# EAGLE board CT_schematic (EAGLE 7.6.0)

Size 100 x 80 mm. Coordinates in mm from the lower left corner, seen from the top.
Outline: 0,0 100,0 100,80 0,80 0,0
Copper layers (1*16): Top 0.035mm / dielectric 1.5mm / Bottom 0.035mm
Design rules "default": minimum track width 10mil, minimum drill 24mil, track to track 8mil, track to pad 8mil, pad to pad 8mil, via to via 8mil, smd to smd 8mil, copper to edge 40mil, drill to drill 8mil, minimum pad ring 10mil, minimum via ring 8mil, stop-mask expansion 4mil, vias tented up to drill 0mil, thermal gap 10mil

## Footprints (pad centres in the part's own frame; a part is rotated, then mirrored left to right if it is on the bottom)
C0603 = smd 0.8 x 0.8: 1 -0.762,0; 2 0.762,0
C0402 = smd 0.5 x 0.5: 1 -0.508,0; 2 0.508,0
C0805 = smd 1.2 x 1.3: 1 -1.016,0; 2 1.016,0
C1210 = smd 1.2 x 2.5: 1 -1.524,0; 2 1.524,0
EXV-9H = smd 3.505 x 1.676: 1 -2.857,0; 2 2.857,0
PJ-037B_PACKAGE = drill 3.7 square: 1 12,0 | drill 3.2 square: 2 6,0
R0603 = smd 0.8 x 0.8: 1 -0.762,0; 2 0.762,0
WLCSP64 = smd 0.34 x 0.34: A1 -1.75,1.75; A2 -1.25,1.75; A3 -0.75,1.75; A4 -0.25,1.75; A5 0.25,1.75; A6 0.75,1.75; A7 1.25,1.75; A8 1.75,1.75; B1 -1.75,1.25; B2 -1.25,1.25; B3 -0.75,1.25; B4 -0.25,1.25; B5 0.25,1.25; B6 0.75,1.25; B7 1.25,1.25; B8 1.75,1.25; C1 -1.75,0.75; C2 -1.25,0.75; C3 -0.75,0.75; C4 -0.25,0.75; C5 0.25,0.75; C6 0.75,0.75; C7 1.25,0.75; C8 1.75,0.75; D1 -1.75,0.25; D2 -1.25,0.25; D3 -0.75,0.25; D4 -0.25,0.25; D5 0.25,0.25; D6 0.75,0.25; D7 1.25,0.25; D8 1.75,0.25; E1 -1.75,-0.25; E2 -1.25,-0.25; E3 -0.75,-0.25; E4 -0.25,-0.25; E5 0.25,-0.25; E6 0.75,-0.25; E7 1.25,-0.25; E8 1.75,-0.25; F1 -1.75,-0.75; F2 -1.25,-0.75; F3 -0.75,-0.75; F4 -0.25,-0.75; F5 0.25,-0.75; F6 0.75,-0.75; F7 1.25,-0.75; F8 1.75,-0.75; G1 -1.75,-1.25; G2 -1.25,-1.25; G3 -0.75,-1.25; G4 -0.25,-1.25; G5 0.25,-1.25; G6 0.75,-1.25; G7 1.25,-1.25; G8 1.75,-1.25; H1 -1.75,-1.75; H2 -1.25,-1.75; H3 -0.75,-1.75; H4 -0.25,-1.75; H5 0.25,-1.75; H6 0.75,-1.75; H7 1.25,-1.75; H8 1.75,-1.75
SOIC-8 = smd 1.6 x 0.6: 1 -2.7,1.905 | smd 1.55 x 0.6: 2 -2.7,0.635; 3 -2.7,-0.635; 4 -2.7,-1.905; 5 2.7,-1.905; 6 2.7,-0.635; 7 2.7,0.635; 8 2.7,1.905
10100565 = smd 0.8 x 2.35: 1 0,0; 2 1.25,0; 3 2.55,0; 4 4.25,0; 5 5.43,0; 6 6.68,0; 7 7.93,0; 8 9.18,0; 9 11.67,0; 10 14.18,0; 11 15.43,0; 12 16.68,0; 13 17.93,0; 14 19.18,0; 15 21.68,0 | smd 1.5 x 3.1: 16 23.495,-1.375; 20 25.685,-22.875 | smd 1.55 x 3.1: 17 -1.815,-1.375; 21 -1.815,-22.875 | drill 1.1 pad 1.1: 18 21.68,-2.375; 19 0.68,-2.375
TDFN-8/6MM = smd 0.3 x 0.75: 1 0,0; 2 0.5,0; 3 1,0; 4 1.5,0; 5 1.5,3; 6 1,3; 7 0.5,3; 8 0,3
ABLS-25.000MHZ-B2F-T = smd 5.6 x 2.8: 1 -3.81,0; 2 5.69,0
ASEK = smd 1.4 x 1: 1 -1.1,-0.8; 2 1.1,-0.8; 3 1.1,0.8; 4 -1.1,0.8
WSON-8 = smd 0.3 x 0.6: 1 -0.75,0; 2 0.05,0; 3 0.85,0; 4 1.65,0; 5 1.65,3.8; 6 0.85,3.8; 7 0.05,3.8; 8 -0.75,3.8 | smd 3 x 2.6: PAD 0.45,1.9
SON-6 = smd 0.55 x 0.3: 1 -0.355,0.5 | smd 0.52 x 0.3: 2 -0.37,0; 3 -0.37,-0.5; 4 0.37,-0.5; 5 0.37,0; 6 0.37,0.5
SW_4-1437565-2 = smd 1.4 x 2.1: 1 -2.23,4.55; 2 -2.23,-4.55; 3 2.23,4.55; 4 2.23,-4.55
LGM67K-G1J2-24-Z = smd 0.8 x 1.4: A -2,0; C 0,0
NC7SZ125M5X = smd 1.3 x 0.7: 1 -1.3,0.95; 2 -1.3,0; 3 -1.3,-0.95; 4 1.3,-0.95; 5 1.3,0.95

## Placement (x,y rotation side)
C1  1e-07  [C0603]  -27.94,72.39 0 top  (outside the outline)
C2  1e-07  [C0603]  -31.75,72.39 0 top  (outside the outline)
C3  1e-07  [C0603]  -35.56,72.39 0 top  (outside the outline)
C4  1e-07  [C0603]  -39.37,72.39 0 top  (outside the outline)
C5  4.7e-06  [C0603]  -24.13,72.39 0 top  (outside the outline)
C6  1e-07  [C0603]  -43.18,72.39 0 top  (outside the outline)
C7  1e-08  [C0603]  -46.99,72.39 0 top  (outside the outline)
C8  1e-06  [C0603]  -50.8,72.39 0 top  (outside the outline)
C9  1e-11  [C0402]  -22.86,77.47 0 top  (outside the outline)
C10  1e-11  [C0402]  -26.67,77.47 0 top  (outside the outline)
C11  1e-08  [C0402]  -30.48,77.47 0 top  (outside the outline)
C12  1e-07  [C0402]  -34.29,77.47 0 top  (outside the outline)
C13  1e-05  [C0805]  -34.29,60.96 0 top  (outside the outline)
C14  1e-08  [C0402]  -38.1,77.47 0 top  (outside the outline)
C15  1e-08  [C0402]  -41.91,77.47 0 top  (outside the outline)
C16  1e-08  [C0402]  -45.72,77.47 0 top  (outside the outline)
C17  1e-05  [C1210]  -16.51,62.23 0 top  (outside the outline)
C18  1e-05  [C1210]  -22.86,62.23 0 top  (outside the outline)
C19  1e-07  [C0402]  -49.53,77.47 0 top  (outside the outline)
C20  0.0001  [EXV-9H]  -17.78,54.61 0 top  (outside the outline)
C21  0.0001  [EXV-9H]  -29.21,54.61 0 top  (outside the outline)
C22  1e-08  [C0402]  -53.34,77.47 0 top  (outside the outline)
J1  PJ-037B  [PJ-037B_PACKAGE]  -58.42,7.62 0 top  (outside the outline)
R2  1000.0  [R0603]  -54.61,72.39 0 top  (outside the outline)
R4  4700.0  [R0603]  -58.42,72.39 0 top  (outside the outline)
R5  2200.0  [R0603]  -62.23,72.39 0 top  (outside the outline)
R6  2200.0  [R0603]  -66.04,72.39 0 top  (outside the outline)
R7  10000.0  [R0603]  -50.8,67.31 0 top  (outside the outline)
R8  10000.0  [R0603]  -55.88,67.31 0 top  (outside the outline)
R9  10000.0  [R0603]  -60.96,67.31 0 top  (outside the outline)
R10  10000.0  [R0603]  -66.04,67.31 0 top  (outside the outline)
R11  100000.0  [R0603]  -39.37,60.96 0 top  (outside the outline)
R12  100000.0  [R0603]  -44.45,60.96 0 top  (outside the outline)
R13  100000.0  [R0603]  -49.53,60.96 0 top  (outside the outline)
R14  100000.0  [R0603]  -54.61,60.96 0 top  (outside the outline)
R15  100000.0  [R0603]  -59.69,60.96 0 top  (outside the outline)
R16  100000.0  [R0603]  -64.77,60.96 0 top  (outside the outline)
R17  100000.0  [R0603]  -69.85,60.96 0 top  (outside the outline)
R18  100000.0  [R0603]  -15.24,67.31 0 top  (outside the outline)
R19  100000.0  [R0603]  -20.32,67.31 0 top  (outside the outline)
R20  100000.0  [R0603]  -25.4,67.31 0 top  (outside the outline)
R21  100000.0  [R0603]  -30.48,67.31 0 top  (outside the outline)
R22  100000.0  [R0603]  -35.56,67.31 0 top  (outside the outline)
R23  2231.0  [R0603]  -69.85,72.39 0 top  (outside the outline)
R24  1000.0  [R0603]  -15.24,77.47 0 top  (outside the outline)
R25  10000.0  [R0603]  -15.24,72.39 0 top  (outside the outline)
R26  10000.0  [R0603]  -20.32,72.39 0 top  (outside the outline)
R27  9100.0  [R0603]  -19.05,77.47 0 top  (outside the outline)
R28  680000.0  [R0603]  -40.64,67.31 0 top  (outside the outline)
R29  120000.0  [R0603]  -45.72,67.31 0 top  (outside the outline)
U1  STM32L162RDY6  [WLCSP64]  -44.45,45.72 0 top  (outside the outline)
U2  AT25010B-SSHL-T  [SOIC-8]  -57.15,34.29 0 top  (outside the outline)
U3  10100565  [10100565]  -40.64,25.4 0 top  (outside the outline)
U4  24AA04-I/MC  [TDFN-8/6MM]  -41.91,34.29 0 top  (outside the outline)
U5  ABLS-25.000MHZ-B2F-T  [ABLS-25.000MHZ-B2F-T]  -48.26,54.61 0 top  (outside the outline)
U6  ASEK-32.768KHz-ECST  [ASEK]  -64.77,45.72 0 top  (outside the outline)
U7  LP3878SDX-ADJ/NOPB  [WSON-8]  -30.48,44.45 0 top  (outside the outline)
U8  TPS3895ADRYR  [SON-6]  -55.88,76.2 0 top  (outside the outline)
U9  4-1437565-2  [SW_4-1437565-2]  -27.94,35.56 0 top  (outside the outline)
U10  Q65110A2395  [LGM67K-G1J2-24-Z]  -59.69,54.61 0 top  (outside the outline)
U11  nc7sz125m5x  [NC7SZ125M5X]  -27.94,60.96 0 top  (outside the outline)

## Library data of the parts
C1-C22 J1 R2 R4-R29 U1-U11 = circuit_tree

## Nets
CLK_CRYSTAL_U1_D7: C9.1 U1.D7 U5.1
CLK_CRYSTAL_U1_D8: C10.1 U1.D8 U5.2
CLK_U1_B8: U1.B8 U6.3
GND: C1.2 C2.2 C3.2 C4.2 C5.2 C6.2 C7.2 C8.2 C9.2 C10.2 C11.2 C12.2 C13.2 C14.2 C15.2 C16.2 C17.2 C18.2 C19.2 C20.2 C21.2 C22.2 J1.2 R2.2 R7.2 R24.2 R27.2 R29.2 U1.A7 U1.B1 U1.E7 U1.F5 U1.H2 U2.4 U3.6 U3.10 U3.12 U3.16 U3.17 U3.20 U3.21 U4.4 U4.7 U6.2 U7.3 U7.PAD U8.2 U10.C U11.1 U11.3
NET_U1_A6: R7.1 U1.A6
NET_U1_B5: R5.1 U1.B5 U4.6
NET_U1_C5: R6.1 U1.C5 U4.5
NET_U1_C6: C6.1 U1.C6
NET_U1_C7: R4.1 U1.C7 U11.4
NET_U1_H7: U10.A
NET_U1_H8: U9.3 U9.4
NET_U2_3: R8.1 U2.3
NET_U2_7: R10.1 U2.7
NET_U3_1: R13.1 U3.1
NET_U3_2: R12.1 U3.2
NET_U3_18: U3.18 U3.19
NET_U7_1: C16.1 U7.1
NET_U7_6: R23.2 R24.1 U7.6
NET_U7_8: R22.1 U7.8
NET_U8_1: R26.1 R27.1 U8.1
NET_U8_3: R28.2 R29.1 U8.3
NET_U8_4: R25.1 U8.4 U11.2
NET_U9_1: R2.1 U9.1 U9.2
PROC_SDIO_CK: R11.1 U1.C4 U3.8
PROC_SDIO_D0: R14.1 U1.E3 U3.4
PROC_SDIO_D1: R15.1 U1.D1 U3.3
PROC_SDIO_D2: R16.1 U1.A2 U3.15
PROC_SDIO_D3: R17.1 U1.B3 U3.14
PROC_SDIO_D4: R18.1 U1.D5 U3.13
PROC_SDIO_D5: R19.1 U1.B6 U3.11
PROC_SDIO_D6: R20.1 U1.E1 U3.7
PROC_SDIO_D7: R21.1 U1.E2 U3.5
PROC_SPI1_MISO: U1.B4 U2.2
PROC_SPI1_MOSI: U1.A5 U2.5
PROC_SPI1_NSS: R9.1 U1.C3 U2.1
PROC_SPI1_SCK: U1.A4 U2.6
VCC_S1_12V8: C17.1 C20.1 C21.1 J1.1 R22.2 U7.4
VCC_TIER1_3V3: C1.1 C2.1 C3.1 C4.1 C5.1 C7.1 C8.1 C11.1 C12.1 C13.1 C14.1 C15.1 C18.1 C19.1 C22.1 R4.2 R5.2 R6.2 R8.2 R9.2 R10.2 R11.2 R12.2 R13.2 R14.2 R15.2 R16.2 R17.2 R18.2 R19.2 R20.2 R21.2 R23.1 R25.2 R26.2 R28.1 U1.A1 U1.A8 U1.G6 U1.G8 U1.H1 U2.8 U3.9 U4.8 U6.4 U7.5 U8.6 U11.5

## Tracks (layer width: path | path; a pad name or v marks a point on that pad's centre or on a via)
CLK_CRYSTAL_U1_D7  (2 unrouted)
CLK_CRYSTAL_U1_D8  (2 unrouted)
CLK_U1_B8  (1 unrouted)
GND  (49 unrouted)
NET_U1_A6  (1 unrouted)
NET_U1_B5  (2 unrouted)
NET_U1_C5  (2 unrouted)
NET_U1_C6  (1 unrouted)
NET_U1_C7  (2 unrouted)
NET_U1_H8  (1 unrouted)
NET_U2_3  (1 unrouted)
NET_U2_7  (1 unrouted)
NET_U3_1  (1 unrouted)
NET_U3_2  (1 unrouted)
NET_U3_18  (1 unrouted)
NET_U7_1  (1 unrouted)
NET_U7_6  (2 unrouted)
NET_U7_8  (1 unrouted)
NET_U8_1  (2 unrouted)
NET_U8_3  (2 unrouted)
NET_U8_4  (2 unrouted)
NET_U9_1  (2 unrouted)
PROC_SDIO_CK  (2 unrouted)
PROC_SDIO_D0  (2 unrouted)
PROC_SDIO_D1  (2 unrouted)
PROC_SDIO_D2  (2 unrouted)
PROC_SDIO_D3  (2 unrouted)
PROC_SDIO_D4  (2 unrouted)
PROC_SDIO_D5  (2 unrouted)
PROC_SDIO_D6  (2 unrouted)
PROC_SDIO_D7  (2 unrouted)
PROC_SPI1_MISO  (1 unrouted)
PROC_SPI1_MOSI  (1 unrouted)
PROC_SPI1_NSS  (2 unrouted)
PROC_SPI1_SCK  (1 unrouted)
VCC_S1_12V8  (5 unrouted)
VCC_TIER1_3V3  (47 unrouted)